# Altium PCB ZYNQ-HS-DEV-PCB.PcbDoc (part 10 of 10)
Units mm, origin at the board's own origin, x right, y up, seen from the top; angles counter-clockwise.
Board outline 125.25 x 111 mm, 10 copper layers (S1 (SIG), S2 (GND), S3 (SIG), S4 (GND), S5 (PWR), S6 (SIG), S7 (GND), S8 (SIG), S9 (GND), S10 (SIG)), stack 1.597 mm thick; 539 components, 408 nets, 2443 pads, 876 vias.
Unrouted connection lines stored in the file: 1310.
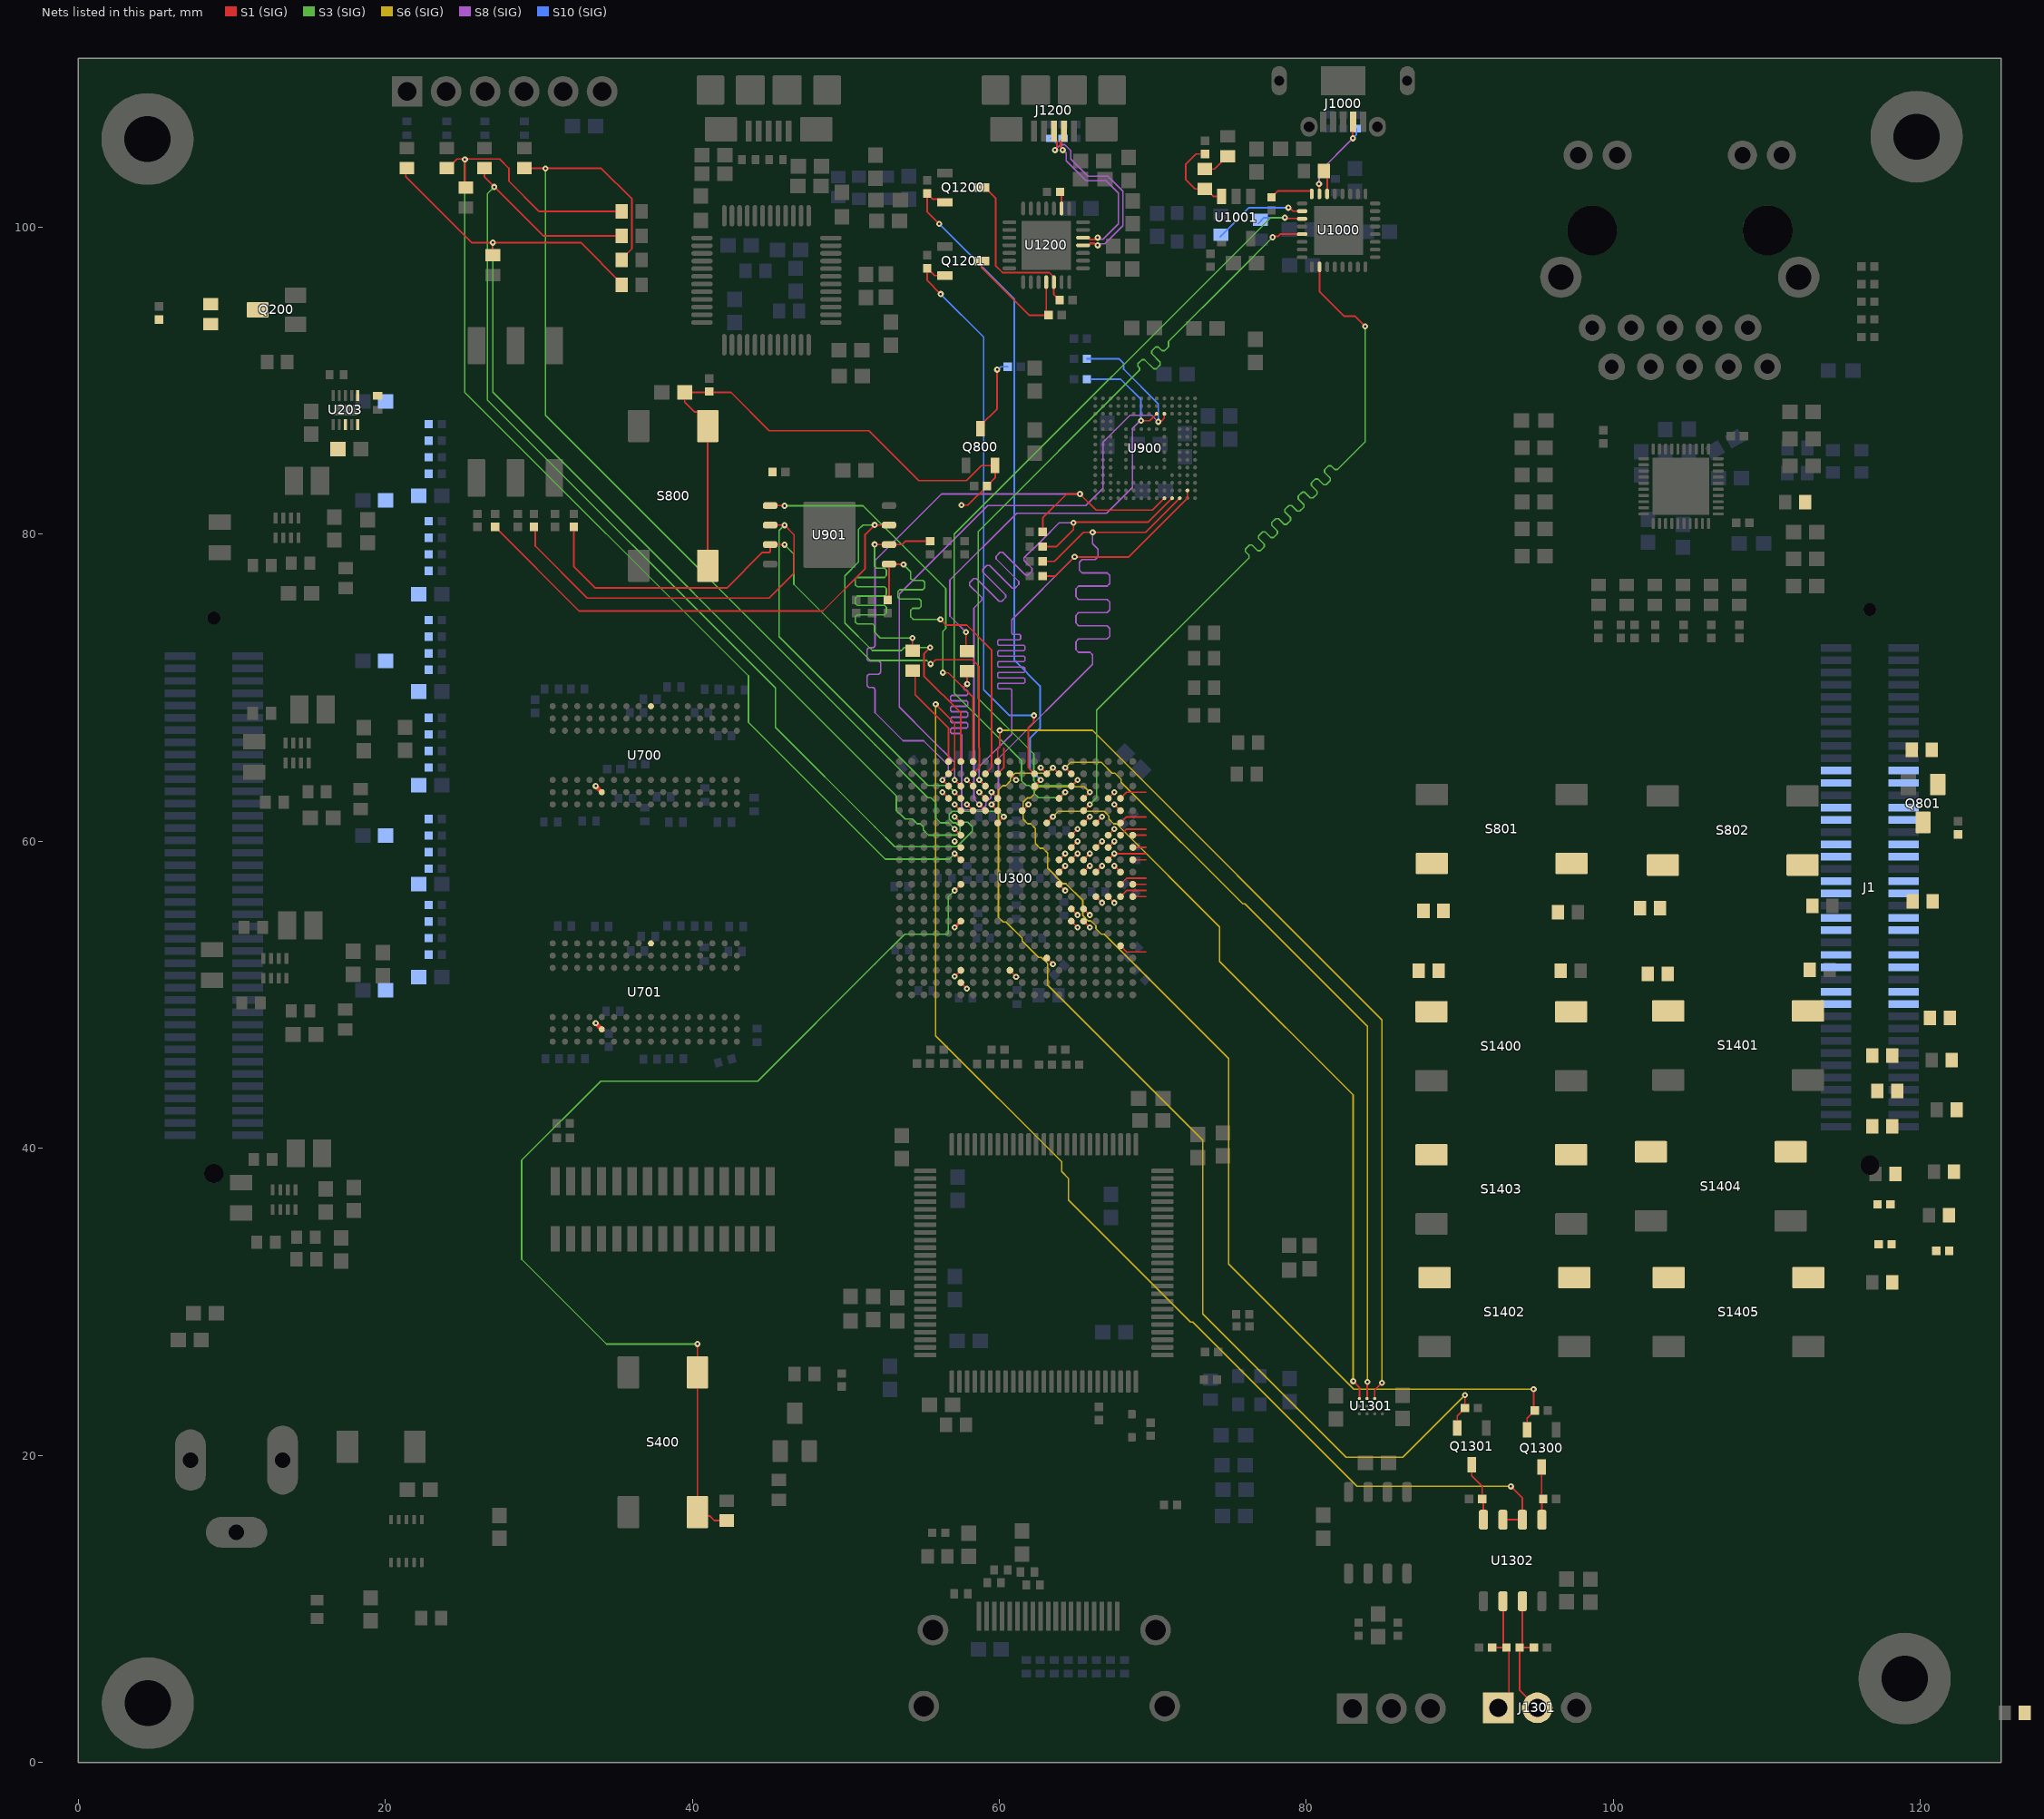
[diagram p14: the nets of this part, all layers, seen from the top]

## Via types
v1: diameter 0.4, hole 0.15, S1 (SIG) to S10 (SIG), tented both sides, 746 vias
v2: diameter 0.5, hole 0.25, S1 (SIG) to S10 (SIG), tented both sides, 108 vias
v3: diameter 0.5, hole 0.2, S1 (SIG) to S10 (SIG), tented both sides, 11 vias
v4: diameter 0.6, hole 0.3, S1 (SIG) to S10 (SIG), tented both sides, 10 vias
v5: diameter 0.45, hole 0.15, S1 (SIG) to S10 (SIG), tented both sides, 1 vias

## Nets (pads, with @x,y where several pads share a name; then routed paths per layer and width w, separated by ;. In a path a pad name is that pad's centre, name@x,y a point inside that pad or via, vN(x,y) a via of type N, cw(c..) or ccw(c..) an arc to the next point about the centre after c; other vN are vias at no path point) (continued)
OTG_ID: D1002.2 J1000.4 U1000.23 | length 6.4
  S1 (SIG) w0.11: v1(80.825,102.825) 80.838,102.812 80.838,102.187 U1000.23@80.85,102.175 ; v1(83.025,105.8) 83.025,106.85 J1000.4@83.05,106.875
  S8 (SIG) w0.1: v1(80.825,102.825) 80.825,103.6 v1(83.025,105.8)
  S10 (SIG) w0.11: v1(83.025,105.8) 83.25,106.025 D1002.2@83.25,106.425
OTG_NXT: U300.E16 U1000.2 | length 53
  S1 (SIG) w0.11: U300.E16@65.488,61.995 v1(65.888,62.395) ; U1000.2@80.85,97.4 80.85,95.825 82.475,94.2 83.175,94.2 v1(83.825,93.55)
  S3 (SIG) w0.1: v1(65.888,62.395) 66.338,62.845 66.338,68.538 76.225,78.425 76.26,78.46 76.26,78.632 76.025,78.868 76.025,79.04 76.283,79.298 76.455,79.298 76.822,78.93 76.994,78.93 77.252,79.188 77.252,79.36 76.885,79.728 76.885,79.9 77.143,80.158 77.315,80.158 77.682,79.79 77.854,79.79 78.112,80.048 78.112,80.22 77.745,80.587 77.745,80.759 78.003,81.017 78.175,81.017 78.542,80.65 78.714,80.65 78.972,80.908 78.972,81.08 78.604,81.447 78.604,81.619 78.862,81.877 79.034,81.877 79.402,81.51 79.574,81.51 79.832,81.768 79.832,81.94 79.464,82.307 79.464,82.479 79.722,82.737 79.894,82.737 80.262,82.369 80.434,82.369 80.692,82.627 80.692,82.799 80.324,83.167 80.324,83.339 80.582,83.597 80.754,83.597 81.122,83.229 81.294,83.229 81.552,83.487 81.552,83.659 81.184,84.027 81.184,84.199 81.442,84.457 81.614,84.457 81.849,84.221 82.021,84.221 82.874,85.074 83.825,86.025 v1(83.825,93.55)
OTG_OC_LED: D1003.1 R1004.1 | length 1.9
  S1 (SIG) w0.11: D1003.1@73.375,103.8 74.015,103.8 74.455,104.24 74.455,104.28 74.8,104.625 R1004.1@74.875,104.625
OTG_RBIAS: R1005.2 U1000.24 | length 2.9
  S1 (SIG) w0.11: R1005.2@77.725,101.95 78.132,102.357 80.285,102.357 80.35,102.292 U1000.24@80.35,102.175
OTG_RCLK: R1002.1 U1000.26 | length 6.2
  S1 (SIG) w0.11: v1(78.825,101.275) 78.891,101.275 79.116,101.05 79.7,101.05 U1000.26@79.713,101.037
  S10 (SIG) w0.11: R1002.1@74.376,99.375 76.276,101.275 v1(78.825,101.275)
OTG_RST: R1001.1 U300.D14 U1000.27 | length 55.1
  S1 (SIG) w0.11: U300.D14@63.888,62.795 v1(64.288,63.195) ; v1(78.6,100.625) 78.648,100.577 79.673,100.577 U1000.27@79.713,100.537
  S3 (SIG) w0.1: v1(64.288,63.195) 63.938,62.845 62.543,62.845 62.265,63.123 62.265,63.313 61.946,63.631 61.756,63.631 61.438,63.95 61.438,65.262 60,66.7 57.05,69.65 57.05,80 77.675,100.625 v1(78.6,100.625)
  S10 (SIG) w0.11: R1001.1@76.875,100.25 77.25,100.625 v1(78.6,100.625)
OTG_STP: U300.C15 U1000.29 | length 53.1
  S1 (SIG) w0.11: U300.C15@64.688,63.595 v1(65.088,63.995) ; v1(77.8,99.35) 77.856,99.405 78.151,99.405 78.295,99.55 U1000.29@79.7,99.55
  S3 (SIG) w0.1: v1(65.088,63.995) 64.738,63.645 62.543,63.645 62.238,63.95 62.238,65.687 58.625,69.3 58.625,80.175 69.088,90.637 69.123,90.673 69.123,90.845 69.024,90.944 69.024,91.116 69.282,91.373 69.454,91.373 70.048,90.779 70.22,90.779 70.478,91.037 70.478,91.209 69.922,91.766 69.922,91.938 70.18,92.196 70.352,92.196 70.585,91.963 70.757,91.963 71.015,92.221 71.015,92.393 71.015,92.564 75.338,96.887 v1(77.8,99.35)
OTG_SW_OCN: D1003.2 R1003.2 U1001.3 | length 5.3
  S1 (SIG) w0.11: R1003.2@73.4,104.775 72.8,104.775 72.15,104.125 72.15,103.1 72.75,102.5 D1003.2@73.375,102.5 73.45,102.5 73.95,102 U1001.3@74.475,102
OTG_VBUS: R1000.1 U1000.22 | length 1.6
  S1 (SIG) w0.11: R1000.1@81.125,103.675 81.35,103.45 U1000.22@81.35,102.175
PG_ALL_LA: D201.1 R210.1
PG_ALL_LK: D201.2 Q200.3
PL13_BTN_1: R1403.2 U300.V6 | length 0.6
  S1 (SIG) w0.11: v1(57.088,51.195) U300.V6@57.488,51.595
PL13_BTN_1_SW: R1403.1 R1405.1 S1400.1 S1400.2
PL13_BTN_2: R1404.2 U300.W6 | length 0.6
  S1 (SIG) w0.11: U300.W6@57.488,50.795 v1(57.888,50.395)
PL13_BTN_2_SW: R1404.1 R1406.1 S1401.1 S1401.2
PL13_LED: R1401.2 U300.V10 | length 0.6
  S1 (SIG) w0.11: U300.V10@60.688,51.595 60.688,51.58 61.088,51.18 v1(61.088,51.165)
PL13_LED_A: D1400.1 R1401.1
PL34_BTN_1: R1409.2 U300.P16 | length 0.6
  S1 (SIG) w0.11: U300.P16@65.488,54.795 v1(65.888,54.395)
PL34_BTN_1_SW: R1409.1 R1414.1 S1403.1 S1403.2
PL34_BTN_2: R1411.2 U300.T19 | length 1.8
  S1 (SIG) w0.11: U300.T19@67.888,53.195 68.288,52.795 69.548,52.795
PL34_BTN_2_SW: R1411.1 R1415.1 S1405.1 S1405.2
PL34_LED: R1407.2 U300.P15 | length 0.6
  S1 (SIG) w0.11: U300.P15@64.688,54.795 v1(65.088,54.395)
PL34_LED_A: D1402.1 R1407.1
PL34_PUDCB: R1400.2 U300.U13 | length 0.6
  S1 (SIG) w0.11: U300.U13@63.088,52.395 v1(63.488,51.995)
PL35_BTN_1: R1408.2 U300.J16 | length 0.6
  S1 (SIG) w0.11: U300.J16@65.488,58.795 v1(65.888,59.195)
PL35_BTN_1_SW: R1408.1 R1412.1 S1402.1 S1402.2
PL35_BTN_2: R1410.2 U300.J15 | length 0.6
  S1 (SIG) w0.11: U300.J15@64.688,58.795 v1(65.088,59.195)
PL35_BTN_2_SW: R1410.1 R1413.1 S1404.1 S1404.2
PL35_LED: R1402.2 U300.K16 | length 0.6
  S1 (SIG) w0.11: U300.K16@65.488,57.995 v1(65.888,58.395)
PL35_LED_A: D1401.1 R1402.1
PL_CLK_125: R1121.2 U300.K17 | length 0.6
  S1 (SIG) w0.11: U300.K17@66.288,57.995 v1(66.688,58.395)
PROGRAM_B_0: R403.1 S400.3 S400.4 U300.L6 | length 70.7
  S1 (SIG) w0.11: v1(40.325,27.25) S400.3@40.325,25.4 S400.4@40.325,16.3 40.569,16.056 41.126,16.056 41.432,15.75 R403.1@42.225,15.75 ; v1(57.088,56.795) U300.L6@57.488,57.195
  S3 (SIG) w0.1: v1(40.325,27.25) 34.4,27.25 28.875,32.775 28.875,39.225 34.025,44.375 44.26,44.375 51.9,52.015 53.83,53.945 56.616,53.945 56.675,54.003 56.675,56.382 v1(57.088,56.795)
PS_1V8MODE: R808.2 U300.D5 | length 0.6
  S1 (SIG) w0.11: v1(56.288,63.195) U300.D5@56.688,62.795
PS_3V3MODE: R807.2 U300.D8 | length 0.6
  S1 (SIG) w0.11: v1(58.688,63.195) U300.D8@59.088,62.795
PS_BTN_1: R821.2 U300.B13 | length 0.6
  S1 (SIG) w0.11: v1(62.688,64.795) U300.B13@63.088,64.395
PS_BTN_2: R822.2 U300.B9 | length 1.8
  S1 (SIG) w0.11: U300.B9@59.888,64.395 60.288,64.795 60.288,66.055
PS_CLK: R817.2 U300.E7 | length 0.6
  S1 (SIG) w0.11: v1(57.888,62.395) U300.E7@58.288,61.995
PS_COUT: R817.1 X800.3
PS_LED: R820.2 U300.E6 | length 0.6
  S1 (SIG) w0.11: v1(57.088,62.395) U300.E6@57.488,61.995
PS_LED_A: D800.1 R819.1
PS_LED_G: Q801.1 R820.1
PS_LED_K: D800.2 Q801.3
PS_MIO_VREF: C803.1 R803.1 R804.1 U300.E11 | length 0.6
  S1 (SIG) w0.11: U300.E11@61.488,61.995 v1(61.888,62.395)
PS_POR: R802.2 U300.C7 U800.4 | length 0.6
  S1 (SIG) w0.11: v1(57.888,63.995) U300.C7@58.288,63.595
PS_QSPI_IO0_M3: R912.2 U300.B8 U901.5 | length 25.6
  S1 (SIG) w0.11: R912.2@52.744,75.73 52.807,75.793 U901.5@52.807,78.058 52.818,78.047 53.743,78.047 v1(53.754,78.036) ; v1(56.16,74.45) 56.527,74.083 57.869,74.083 59.488,72.464 59.488,64.795 U300.B8@59.088,64.395
  S3 (SIG) w0.1: v1(53.754,78.036) 54.226,77.564 54.226,77.17 54.226,77.12 54.348,76.999 55.016,76.999 55.137,76.877 55.137,76.512 55.016,76.391 53.513,76.391 53.392,76.269 53.392,75.904 53.513,75.783 54.781,75.783 54.903,75.661 54.903,75.296 54.781,75.175 54.348,75.175 54.226,75.053 54.226,74.621 54.348,74.499 54.397,74.45 v1(56.16,74.45)
PS_QSPI_IO1_M1: R914.2 U300.D6 U901.2 | length 48.1
  S1 (SIG) w0.11: R914.2@29.537,80.341 29.693,80.341 29.775,80.259 29.775,79.225 33.159,75.841 44.991,75.841 46.625,77.475 46.625,79.965 v1(46.003,80.587) ; U901.2@45.067,80.598 v1@45.992,80.598 ; v1(57.088,63.195) U300.D6@57.488,62.795
  S3 (SIG) w0.11: v1(46.003,80.587) 45.648,80.232 45.648,73.332 55.341,63.64 56.643,63.64 v1(57.088,63.195)
PS_QSPI_IO2_M2: R915.2 U300.B7 U901.3 | length 42.8
  S1 (SIG) w0.11: R915.2@32.282,80.479 32.282,77.893 33.675,76.5 42.25,76.5 44.567,78.817 45.003,78.817 45.067,78.881 U901.3@45.067,79.328 v1@45.992,79.328 ; v1(55.521,71.544) 55.563,71.544 55.839,71.82 58.249,71.82 58.675,71.394 58.675,66.1 58.688,66.087 58.688,64.795 U300.B7@58.288,64.395
  S3 (SIG) w0.1: v1(46.003,79.317) 46.609,78.711 46.609,76.745 51.579,71.775 55.262,71.775 55.493,71.544 v1(55.521,71.544)
PS_QSPI_IO3_M0: R911.2 U300.A6 U901.7 | length 54.2
  S1 (SIG) w0.11: R911.2@27.15,80.479 32.629,75 48.5,75 51.25,77.75 51.25,79.988 v1(51.871,80.609) ; v1@51.882,80.598 51.888,80.603 52.802,80.603 U901.7@52.807,80.598 ; v1(55.483,72.617) 55.08,72.214 55.08,70.763 57.488,68.355 U300.A6@57.488,65.195
  S3 (SIG) w0.1: v1(51.871,80.609) 51.109,80.609 50.819,80.319 50.819,78.194 49.925,77.3 49.925,74.225 51.721,72.429 53.619,72.429 53.807,72.617 v1(55.483,72.617)
PS_QSPI_SCK_M4: R806.1 R913.2 U901.6 | length 24.1
  S1 (SIG) w0.11: v1@51.882,79.328 53.072,79.328 53.657,79.328 53.876,79.547 R913.2@55.495,79.547 ; v1(54.334,73.246) 54.334,72.421 R806.1@54.397,72.358
  S3 (SIG) w0.1: v1(51.871,79.339) 51.871,78.33 51.871,77.919 51.993,77.798 52.519,77.798 52.641,77.676 52.641,77.311 52.519,77.19 50.741,77.19 50.619,77.068 50.619,76.703 50.741,76.582 52.519,76.582 52.641,76.46 52.641,76.095 52.519,75.974 50.741,75.974 50.619,75.852 50.619,75.487 50.741,75.366 52.519,75.366 52.641,75.244 52.641,74.879 52.519,74.758 50.741,74.758 50.619,74.636 50.619,74.271 50.741,74.15 51.749,74.15 51.871,74.028 51.871,73.978 51.871,73.619 52.244,73.246 v1(54.334,73.246)
PS_QSPI_SS: R908.1 U300.A7 U901.1 | length 26
  S1 (SIG) w0.11: U901.1@45.067,81.868 v1@45.992,81.868 ; v1(56.32,70.983) 56.34,70.963 56.685,70.963 58.288,69.36 U300.A7@58.288,65.195
  S3 (SIG) w0.1: v1(46.003,81.857) 51.118,81.857 56.51,76.465 56.51,73.86 56.32,73.67 v1(56.32,70.983)
PS_SD_CLK: R809.1 R900.1 U900.M6 | length 30.5
  S1 (SIG) w0.11: v1(57.825,73.625) 57.825,72.45 R809.1@57.9,72.375 ; v1(69.225,87.4) 69.796,87.4 U900.M6@70.246,87.85
  S8 (SIG) w0.1: v1(57.825,73.625) 56.775,74.675 56.775,77.025 61.125,81.375 66.991,81.375 68.675,83.059 68.675,86.899 69.176,87.4 v1(69.225,87.4)
  S10 (SIG) w0.11: 65.975,90.1 67.9,90.1 69.225,88.775 v1(69.225,87.4)
PS_SD_CMD: R901.1 U300.C6 U900.M5 | length 45.8
  S1 (SIG) w0.11: v1(57.088,63.995) U300.C6@57.488,63.595 ; v1(70.35,87.325) 70.405,87.38 70.555,87.38 70.735,87.56 70.735,87.839 U900.M5@70.746,87.85
  S8 (SIG) w0.1: v1(57.088,63.995) 57.088,65.137 55.525,66.7 53.475,68.75 53.475,76.1 59.25,81.875 65.625,81.875 66.748,82.998 66.748,85.997 68.501,87.75 69.925,87.75 v1(70.35,87.325)
  S10 (SIG) w0.11: R901.1@65.7,91.425 67.8,91.425 68.1,91.125 68.1,90.75 70.35,88.5 v1(70.35,87.325)
PS_SD_IO0: R905.1 U300.E9 U900.A3 | length 45.5
  S1 (SIG) w0.11: v1(59.488,62.395) U300.E9@59.888,61.995 ; R905.1@62.825,78.233 63.575,78.233 65.467,80.125 v1(66.075,80.125) 69.521,80.125 U900.A3@71.746,82.35
  S8 (SIG) w0.1: v1(59.488,62.395) 59.938,62.845 59.938,65.393 66.075,71.53 66.075,72.092 66.075,72.142 65.903,72.314 65.159,72.314 64.987,72.487 64.987,73.004 65.159,73.176 67.023,73.176 67.195,73.349 67.195,73.866 67.023,74.038 65.159,74.038 64.987,74.211 64.987,74.728 65.159,74.9 67.023,74.9 67.195,75.073 67.195,75.59 67.023,75.762 65.159,75.762 64.987,75.935 64.987,76.452 65.159,76.624 67.023,76.624 67.195,76.797 67.195,77.314 67.023,77.486 65.391,77.486 65.218,77.659 65.218,78.176 65.391,78.348 66.248,78.348 66.421,78.521 66.421,79.038 66.248,79.21 66.075,79.383 66.075,79.78 v1(66.075,80.125)
PS_SD_IO1: R904.1 U300.E8 U900.A4 | length 45.3
  S1 (SIG) w0.11: v1(58.688,62.395) U300.E8@59.088,61.995 ; R904.1@62.825,79.192 62.827,79.189 63.715,79.189 64.825,80.299 v1(64.825,80.75) 64.875,80.8 69.696,80.8 U900.A4@71.246,82.35
  S8 (SIG) w0.1: v1(58.688,62.395) 58.338,62.745 58.338,75.188 58.826,75.676 58.861,75.711 58.861,75.883 58.066,76.678 58.066,76.85 58.324,77.108 58.496,77.108 59.978,75.627 60.15,75.627 60.408,75.885 60.408,76.057 58.926,77.538 58.926,77.71 59.184,77.968 59.356,77.968 60.837,76.487 61.009,76.487 61.267,76.745 61.267,76.917 59.786,78.398 59.786,78.57 60.044,78.828 60.216,78.828 61.697,77.347 61.869,77.347 62.127,77.605 62.127,77.777 61.613,78.291 61.613,78.463 62.838,79.687 63.9,80.75 v1(64.825,80.75)
PS_SD_IO2: R903.1 U300.C5 U900.A5 | length 45.4
  S1 (SIG) w0.11: v1(56.288,63.995) U300.C5@56.688,63.595 ; R903.1@62.825,80.15 62.825,81.075 64.375,82.625 v1(65.25,82.625) 66.3,81.575 69.971,81.575 U900.A5@70.746,82.35
  S8 (SIG) w0.1: v1(56.288,63.995) 56.663,64.37 56.663,64.639 56.663,64.95 55.063,66.55 53.732,66.55 51.9,68.382 51.9,69.798 51.9,69.848 ccw(c51.728,69.848) 51.728,70.02 51.553,70.02 cw(c51.553,70.192) 51.381,70.192 51.381,70.71 cw(c51.553,70.71) 51.553,70.882 52.091,70.882 ccw(c52.091,71.054) 52.263,71.054 52.263,71.572 ccw(c52.091,71.572) 52.091,71.744 51.553,71.744 cw(c51.553,71.916) 51.381,71.916 51.381,72.434 cw(c51.553,72.434) 51.553,72.606 51.728,72.606 ccw(c51.728,72.778) 51.9,72.778 51.9,76.988 51.9,78.3 56.225,82.625 v1(65.25,82.625)
PS_SD_IO3: R902.1 U300.C8 U900.B2 | length 45.7
  S1 (SIG) w0.11: v1(58.688,63.995) U300.C8@59.088,63.595 ; 63.1,77.275 63.65,77.275 v1(64.9,78.525) 68.421,78.525 72.246,82.35 U900.B2@72.246,82.85
  S8 (SIG) w0.1: v1(58.688,63.995) 58.688,64.865 60.8,66.978 60.8,69.817 60.8,69.867 60.729,69.938 59.96,69.938 59.889,70.008 59.889,70.221 59.96,70.292 61.589,70.292 61.66,70.362 61.66,70.575 61.589,70.646 59.96,70.646 59.889,70.716 59.889,70.929 59.96,71 61.589,71 61.66,71.07 61.66,71.283 61.589,71.354 59.96,71.354 59.889,71.424 59.889,71.637 59.96,71.708 61.589,71.708 61.66,71.778 61.66,71.991 61.589,72.062 59.96,72.062 59.889,72.132 59.889,72.345 59.96,72.416 61.589,72.416 61.66,72.486 61.66,72.699 61.589,72.77 59.96,72.77 59.889,72.84 59.889,73.053 59.96,73.124 61.308,73.124 61.379,73.194 61.379,73.407 61.308,73.478 60.871,73.478 60.8,73.548 60.8,74.101 60.8,74.425 v1(64.9,78.525)
PS_SRST: C801.2 Q800.2 R800.1 R818.1 S800.3 S800.4 U300.B10 | length 39.4
  S1 (SIG) w0.11: S800.4@41,77.95 S800.3@41,87.05 41,87.331 40.356,87.975 40.135,87.975 39.5,88.61 C801.2@39.5,89.25 41.046,89.25 R800.1@41.1,89.304 41.154,89.25 42.5,89.25 45,86.75 51.5,86.75 54.75,83.5 57.849,83.5 58.824,84.475 Q800.2@59.725,84.475 59.725,83.675 R818.1@59.2,83.15 57.95,81.9 v1(57.525,81.9) ; U300.B10@60.688,64.395 v1(61.088,63.995)
PSBTN1SW: R821.1 R823.1 S801.1 S801.2
PSBTN2SW: R822.1 R824.1 S802.1 S802.2
QSPI_CLK: R806.2 U300.A5 | length 6.8
  S1 (SIG) w0.11: R806.2@54.397,71.058 54.511,70.944 54.511,69.55 56.688,67.374 U300.A5@56.688,65.195
RS485_A: J1301.1 R1304.1 R1305.2 U1302.6 | length 8.3
  S1 (SIG) w0.11: R1304.1@92.1,7.475 R1305.2@93.037,7.475 ; J1301.1@92.5,3.55 93.197,4.247 93.197,7.315 R1305.2@93.037,7.475 ; U1302.6@92.805,10.5 92.818,10.487 92.818,7.695 R1305.2@93.037,7.475
RS485_B: J1301.2 R1305.1 R1308.2 U1302.7 | length 8.4
  S1 (SIG) w0.11: U1302.7@94.075,10.5 94.075,7.662 R1305.1@93.888,7.475 ; R1308.2@94.825,7.475 R1305.1@93.888,7.475 ; J1301.2@95.04,3.55 93.888,4.703 R1305.1@93.888,7.475
RS485_IC_RX: Q1300.3 R1303.2 U1302.1 | length 3.5
  S1 (SIG) w0.11: Q1300.3@95.325,19.25 95.325,17.25 R1303.2@95.425,17.15 95.345,17.07 U1302.1@95.345,15.8
RS485_IC_TX: Q1301.3 R1307.2 U1302.4 | length 3.9
  S1 (SIG) w0.11: Q1301.3@90.775,19.375 90.775,18.663 91.45,17.988 R1307.2@91.45,17.15 91.535,17.065 U1302.4@91.535,15.8
RSCAN.CAN_RX: U300.B15 U1301.B3 | length 51.9
  S1 (SIG) w0.11: v1(64.288,64.795) U300.B15@64.688,64.395 ; U1301.B3@83.95,23.7 83.962,23.713 83.962,24.762 v1(83.975,24.775)
  S6 (SIG) w0.1: v1(64.288,64.795) 64.638,65.145 66.643,65.145 67.343,64.445 67.533,64.445 67.938,64.04 67.938,63.85 75.861,55.926 75.994,55.926 83.975,47.945 83.975,24.8 v1@84,24.775
RSCAN.CAN_STB: U300.A9 U1301.C3 | length 59.7
  S1 (SIG) w0.11: U300.A9@59.888,65.195 59.888,65.989 60.025,66.126 v1(60.025,67.225) ; U1301.C3@84.45,23.7 84.45,24.25 v1(84.925,24.725)
  S6 (SIG) w0.1: v1(60.025,67.225) 66.07,67.225 84.925,48.37 v1(84.925,24.725) v1@84.95,24.7
RSCAN.CAN_TX: U300.F13 U1301.A3 | length 49.3
  S1 (SIG) w0.11: U300.F13@63.088,61.195 v1(63.488,61.595) ; v1(83.05,24.825) 83.45,24.425 U1301.A3@83.45,23.7
  S6 (SIG) w0.1: v1(63.488,61.595) 63.838,61.945 66.833,61.945 67.138,61.64 67.138,61.45 67.443,61.145 67.633,61.145 74.35,54.427 74.35,52.17 83.05,43.47 v1(83.05,24.825)
RSCAN.RS485_DE: U300.B5 U1302.2 U1302.3 | length 81.4
  S1 (SIG) w0.11: v1(55.85,68.925) 57.088,67.687 57.088,64.795 U300.B5@56.688,64.395 ; U1302.3@92.805,15.8 U1302.2@94.075,15.8 94.075,17.225 v1(93.325,17.975)
  S6 (SIG) w0.1: v1(55.85,68.925) 55.85,47.33 64.05,39.13 64.05,38.484 64.5,38.034 64.5,36.634 72.459,28.675 72.591,28.675 83.291,17.975 v1(93.325,17.975)
RSCAN.RS485_RX: Q1300.2 R1302.2 U300.D16 | length 67.9
  S1 (SIG) w0.11: U300.D16@65.488,62.795 v1(65.888,63.195) ; Q1300.2@94.375,21.65 94.375,22.425 R1302.2@94.875,22.925 94.8,23 v1(94.8,24.3)
  S6 (SIG) w0.1: v1(65.888,63.195) 65.538,63.545 62.543,63.545 62.275,63.277 62.275,63.087 62.008,62.82 61.818,62.82 61.538,62.54 61.538,61.45 61.843,61.145 62.033,61.145 62.338,60.84 62.338,59.85 62.643,59.545 62.833,59.545 63.138,59.24 63.138,58.25 64.152,57.235 64.342,57.235 65.438,56.14 65.438,55.15 65.768,54.82 65.958,54.82 66.288,54.49 66.288,54.3 66.643,53.945 66.833,53.945 74.928,45.85 74.928,32.452 83.08,24.3 v1(94.8,24.3)
RSCAN.RS485_TX: Q1301.2 R1306.2 U300.B14 | length 69.7
  S1 (SIG) w0.11: v1(63.488,64.795) U300.B14@63.888,64.395 ; Q1301.2@89.825,21.775 89.825,22.575 R1306.2@90.325,23.075 v1(90.325,23.925)
  S6 (SIG) w0.1: v1(63.488,64.795) 63.121,64.428 61.026,64.428 60.717,64.119 60.717,63.929 60.415,63.627 60.225,63.627 59.938,63.34 59.938,55.05 60.243,54.745 60.433,54.745 61.488,53.69 61.488,53.5 62.543,52.445 62.733,52.445 63.138,52.04 63.138,50.642 73.25,40.53 73.25,29.205 82.58,19.875 86.275,19.875 v1(90.325,23.925)
SD_CLK_OUT: R809.2 U300.D9 | length 20.3
  S1 (SIG) w0.11: v1(57.9,70.25) R809.2@57.9,71.075 ; v1(59.488,63.195) U300.D9@59.888,62.795
  S8 (SIG) w0.1: v1(57.9,70.25) 57.753,70.103 57.679,70.029 57.679,69.929 57.75,69.858 57.865,69.858 57.936,69.787 57.936,69.575 57.865,69.504 56.89,69.504 56.82,69.433 56.82,69.221 56.89,69.15 57.865,69.15 57.936,69.079 57.936,68.867 57.865,68.796 56.89,68.796 56.82,68.725 56.82,68.513 56.89,68.442 57.865,68.442 57.936,68.371 57.936,68.159 57.865,68.088 56.89,68.088 56.82,68.017 56.82,67.805 56.89,67.734 57.865,67.734 57.936,67.663 57.936,67.451 57.865,67.38 56.89,67.38 56.82,67.309 56.82,67.097 56.89,67.026 57.467,67.026 57.538,66.955 57.538,66.905 57.538,62.25 57.743,62.045 58.833,62.045 59.131,62.344 59.131,62.534 59.443,62.845 59.443,63.15 v1(59.488,63.195)
SD_RST: Q800.3 R907.1 | length 5.1
  S1 (SIG) w0.11: Q800.3@58.775,86.875 58.775,87.095 59.85,88.17 v1(59.85,90.725)
  S10 (SIG) w0.11: v1(59.85,90.725) 59.919,90.725 60.11,90.916 R907.1@60.55,90.916
SE35.L3_35_N: J1.23 U300.D19 | length 1.8
  S1 (SIG) w0.11: U300.D19@67.888,62.795 68.288,63.195 69.548,63.195
SE35.L3_35_P: J1.21 U300.D18 | length 0.6
  S1 (SIG) w0.11: U300.D18@67.088,62.795 v1(67.488,63.195)
SE35.L5_35_N: J1.29 U300.F16 | length 0.6
  S1 (SIG) w0.11: U300.F16@65.488,61.195 v1(65.888,61.595)
SE35.L5_35_P: J1.27 U300.E19 | length 0.6
  S1 (SIG) w0.11: v1(67.488,62.395) U300.E19@67.888,61.995
SE35.L6_35_N: J1.35 U300.M19 | length 1.8
  S1 (SIG) w0.11: U300.M19@67.888,56.395 68.288,56.795 69.548,56.795
SE35.L6_35_P: J1.33 U300.F17 | length 0.6
  S1 (SIG) w0.11: U300.F17@66.288,61.195 v1(66.688,61.595)
SE35.L7_35_N: J1.41 U300.M17 | length 0.6
  S1 (SIG) w0.11: U300.M17@66.288,56.395 v1(66.688,55.995)
SE35.L7_35_P: J1.39 U300.M20 | length 0.9
  S1 (SIG) w0.11: U300.M20@68.688,56.395 69.548,56.395
SE35.L8_35_N: J1.47 U300.L19 | length 1.8
  S1 (SIG) w0.11: U300.L19@67.888,57.195 68.288,57.595 69.548,57.595
SE35.L8_35_P: J1.45 U300.M18 | length 0.6
  S1 (SIG) w0.11: U300.M18@67.088,56.395 v1(67.488,55.995)
SE35.L9_35_N: J1.53 U300.K19 | length 0.6
  S1 (SIG) w0.11: v1(67.488,58.395) U300.K19@67.888,57.995
SE35.L9_35_P: J1.51 U300.L20 | length 0.9
  S1 (SIG) w0.11: U300.L20@68.688,57.195 69.548,57.195
SE35.L13_35_N: J1.59 U300.J18 | length 2.6
  S1 (SIG) w0.11: U300.J18@67.088,58.795 v1(67.488,59.195) 69.548,59.195
SE35.L13_35_P: J1.57 U300.H17 | length 0.6
  S1 (SIG) w0.11: U300.H17@66.288,59.595 v1(66.688,59.995)
SE35.L14_35_N: J1.24 U300.F19 | length 1.8
  S1 (SIG) w0.11: U300.F19@67.888,61.195 68.288,61.595 69.548,61.595
SE35.L14_35_P: J1.22 U300.H18 | length 0.6
  S1 (SIG) w0.11: U300.H18@67.088,59.595 v1(67.488,59.995)
SE35.L16_35_N: J1.30 U300.J20 | length 0.9
  S1 (SIG) w0.11: U300.J20@68.688,58.795 69.548,58.795
SE35.L16_35_P: J1.28 U300.G18 | length 0.6
  S1 (SIG) w0.11: U300.G18@67.088,60.395 v1(67.488,60.795)
SE35.L17_35_N: J1.36 U300.G19 | length 1.8
  S1 (SIG) w0.11: U300.G19@67.888,60.395 68.288,60.795 69.548,60.795
SE35.L17_35_P: J1.34 U300.H20 | length 0.9
  S1 (SIG) w0.11: U300.H20@68.688,59.595 69.548,59.595
SE35.L18_35_N: J1.42 U300.H15 | length 0.6
  S1 (SIG) w0.11: U300.H15@64.688,59.595 v1(65.088,59.995)
SE35.L18_35_P: J1.40 U300.G20 | length 0.9
  S1 (SIG) w0.11: U300.G20@68.688,60.395 69.548,60.395
SE35.L19_35_N: J1.48 U300.K14 | length 0.6
  S1 (SIG) w0.11: U300.K14@63.888,57.995 v1(64.288,58.395)
SE35.L19_35_P: J1.46 U300.G15 | length 0.6
  S1 (SIG) w0.11: U300.G15@64.688,60.395 v1(65.088,60.795)
SE35.L20_35_N: J1.54 U300.N15 | length 0.6
  S1 (SIG) w0.11: U300.N15@64.688,55.595 v1(65.088,55.195)
SE35.L20_35_P: J1.52 U300.J14 | length 0.6
  S1 (SIG) w0.11: U300.J14@63.888,58.795 v1(64.288,59.195)
SE35.L21_35_N: J1.60 U300.L14 | length 0.6
  S1 (SIG) w0.11: U300.L14@63.888,57.195 v1(64.288,56.795)
SE35.L21_35_P: J1.58 U300.N16 | length 0.6
  S1 (SIG) w0.11: U300.N16@65.488,55.595 v1(65.888,55.195)
TCK_0: R400.1 R500.2 R505.1 U300.J6 | length 77.6
  S1 (SIG) w0.11: R505.1@24,103.85 24.075,103.85 24.675,104.45 27.436,104.45 28.05,103.836 28.05,103 30.017,101.033 R500.2@35.4,101.033 ; v1(25.178,104.423) 25.178,102.646 R400.1@25.236,102.588 ; v1(57.088,59.195) U300.J6@57.488,58.795
  S3 (SIG) w0.1: v1(25.178,104.423) 25.178,89.244 43.65,70.772 43.65,67.755 52.566,58.839 56.731,58.839 v1(57.088,59.195)
TDI_0: R502.2 R507.1 U300.G6 | length 67.1
  S1 (SIG) w0.11: R507.1@29.05,103.85 34.047,103.85 36.061,101.835 36.061,98.611 35.4,97.95 R502.2@35.4,97.875 ; v1(57.088,60.795) U300.G6@57.488,60.395
  S3 (SIG) w0.1: v1(30.43,103.829) 30.43,87.757 51.9,66.287 55.343,62.845 55.533,62.845 55.86,62.518 55.86,61.528 56.186,61.201 56.681,61.201 v1(57.088,60.795)
TDO_0: R501.2 R506.1 U300.F6 | length 73
  S1 (SIG) w0.11: R506.1@26.45,103.85 26.45,103.285 30.293,99.442 R501.2@35.4,99.442 ; v1(57.088,61.595) U300.F6@57.488,61.195
  S3 (SIG) w0.1: v1(27.085,102.624) 26.65,102.189 26.65,88.745 45.405,69.99 45.405,67.425 51.9,60.93 53.185,59.645 57.233,59.645 58.238,60.65 58.238,60.94 57.939,61.239 57.444,61.239 v1(57.088,61.595)
TMS_0: R401.1 R503.2 R509.1 U300.F9 | length 77.2
  S1 (SIG) w0.11: R509.1@21.4,103.85 21.325,103.775 21.325,103.285 25.61,99 v1(27,99) ; R401.1@27,98.176 v1(27,99) ; R503.2@35.4,96.258 35.4,96.333 32.733,99 v1(27,99) ; U300.F9@59.888,61.195 v1(60.288,61.595)
  S3 (SIG) w0.1: v1(27,99) 27,89.25 53.29,62.96 53.29,62.015 53.856,61.45 54.338,61.45 54.543,61.245 54.643,61.145 54.833,61.145 55.038,60.94 55.038,60.75 55.388,60.4 57.188,60.4 57.438,60.65 57.438,60.94 57.183,61.195 56.993,61.195 56.738,61.45 56.738,61.74 56.943,61.945 59.938,61.945 v1(60.288,61.595)
UART_IC_RX: Q1201.3 R1203.2 U1200.25 | length 8.3
  S1 (SIG) w0.11: Q1201.3@58.85,97.8 58.85,97.355 61.93,94.275 R1203.2@63.2,94.275 63.05,94.425 U1200.25@63.05,96.425
UART_IC_TX: Q1200.3 R1200.2 U1200.26 | length 11.3
  S1 (SIG) w0.11: Q1200.3@58.85,102.575 59.07,102.575 59.752,101.893 59.752,97.502 60.209,97.045 63.255,97.045 63.55,96.75 63.55,95.625 R1200.2@63.925,95.25
USB_UART_D_N: D1201.2 J1200.2 U1200.5 | length 12.2
  S1 (SIG) w0.121: v1(64.125,105.025) 64.125,105.1 63.999,105.226 63.999,105.587 64.2,105.787 J1200.2@64.2,106.262 ; U1200.5@65.45,99.325 65.784,99.325 65.91,99.199 66.199,99.199 66.325,99.325 v1(66.4,99.325)
  S8 (SIG) w0.1: v1(64.125,105.025) 64.163,105.025 64.35,104.838 64.35,104.325 65.651,103.025 66.95,103.025 67.75,102.225 67.75,100.225 66.75,99.225 66.581,99.225 66.481,99.325 v1(66.4,99.325)
  S10 (SIG) w0.121: v1(64.125,105.025) 64.125,105.1 63.999,105.226 63.999,105.645 D1201.2@64.147,105.793
USB_UART_D_P: D1202.2 J1200.3 U1200.4 | length 14
  S1 (SIG) w0.121: J1200.3@63.55,106.262 63.55,105.787 63.751,105.587 63.751,105.226 63.625,105.1 v1(63.625,105.025) ; U1200.4@65.45,98.825 65.784,98.825 65.91,98.951 66.199,98.951 66.325,98.825 v1(66.4,98.825)
  S8 (SIG) w0.1: v1(63.625,105.025) 63.975,105.375 64.27,105.375 64.65,104.995 64.65,104.45 65.775,103.325 67.075,103.325 68.05,102.349 68.05,100.101 66.874,98.925 66.581,98.925 66.481,98.825 v1(66.4,98.825)
  S10 (SIG) w0.121: D1202.2@63.329,105.793 63.379,105.793 63.751,105.421 63.751,105.226 63.625,105.1 v1(63.625,105.025)
USB_UART_RST: R1202.1 U1200.9 | length 1.1
  S1 (SIG) w0.11: R1202.1@63.95,102.3 64.05,102.2 U1200.9@64.05,101.225
USB_UART_RX: Q1200.2 R1201.2 U300.C12 | length 43.8
  S1 (SIG) w0.11: v1(56.075,100.225) 55.3,101 R1201.2@55.3,102.2 55.676,101.824 56.251,101.824 Q1200.2@56.45,101.625 ; U300.C12@62.288,63.595 v1(62.688,63.995)
  S10 (SIG) w0.11: v1(56.075,100.225) 60.975,95.325 60.975,71.8 62.652,70.123 62.652,67.357 61.995,66.7 61.995,64.687 v1(62.688,63.995)
USB_UART_TX: Q1201.2 R1204.2 U300.B12 | length 38.4
  S1 (SIG) w0.11: v1(56.175,95.65) 55.3,96.525 R1204.2@55.3,97.325 55.775,96.85 Q1201.2@56.45,96.85 ; v1(62.25,68.2) 62.25,67.775 61.888,67.413 61.888,64.795 U300.B12@62.288,64.395
  S10 (SIG) w0.11: v1(56.175,95.65) 58.975,92.85 58.975,69.875 60.65,68.2 v1(62.25,68.2)
VTT: C212.2 C602.2 C603.2 C604.2 C605.2 C606.2 C607.2 C608.2 C609.2 C610.2 C611.2 C612.2 R600.1 R601.1 R602.1 R603.1 R604.1 R605.1 R606.1 R607.1 R608.1 R609.1 R610.1 R611.1 R612.1 R613.1 R614.1 R615.1 R616.1 R617.1 R618.1 R619.1 R620.1 R621.1 R622.1 R623.1 U203.3 U203.5
VTT_REF: C213.2 C600.2 C601.2 C712.2 C713.2 U203.6 U300.H6 U300.P6 U700.H1 U700.M8 U701.H1 U701.M8 | length 1.7
  S1 (SIG) w0.2: v1(57.088,54.395) U300.P6@57.488,54.795
  S1 (SIG) w0.3: v1(33.7,48.15) U701.M8@34.1,47.75 ; v1(33.7,63.6) U700.M8@34.1,63.2
  other v1: 57.088,59.995
pads on no net: J1.63 J1.64 J1.65 J1.66 J1.69 J1.70 J1.71 J1.72 J1.75 J1.76 J1.77 J1.78 J1.MH J2.15 J2.17 J2.75 J2.77 J2.MH J500.4 J1100.1 J1100.MH J1200.4 U201.9 U300.A20 U300.B19 U300.B20 U300.C20 U300.D20 U300.E17 U300.E18 U300.F20 U300.G14 U300.G17 U300.H16 U300.J19 U300.K18 U300.L15 U300.L16 U300.L17 U300.M14 U300.M15 U300.R19 U300.T9 U300.U10 U300.U14 U300.V5 U300.V7 U300.V11 U300.V13 U300.Y12 U500.2 U500.17 U500.18 U500.19 U500.20 U500.21 U500.25 U500.26 U500.27 U500.28 U500.29 U500.30 U500.31 U500.32 U500.33 U500.43 U500.44 U500.45 U700.J1 U700.J9 U700.L1 U700.L9 U700.M7 U701.J1 U701.J9 U701.L1 U701.L9 U701.M7 U800.1 U802.1 U802.6 U803.1 U900.A1 U900.A2 U900.A7 U900.A8 U900.A9 U900.A10 U900.A11 U900.A12 U900.A13 U900.A14 U900.B1 U900.B3 U900.B4 U900.B5 U900.B6 U900.B7 U900.B8 U900.B9 U900.B10 U900.B11 U900.B12 U900.B13 U900.B14 U900.C1 U900.C3 U900.C5 U900.C7 U900.C8 U900.C9 U900.C10 U900.C11 U900.C12 U900.C13 U900.C14 U900.D1 U900.D2 U900.D3 U900.D4 U900.D12 U900.D13 U900.D14 U900.E1 U900.E2 U900.E3 U900.E5 U900.E8 U900.E9 U900.E10 U900.E12 U900.E13 U900.E14 U900.F1 U900.F2 U900.F3 U900.F10 U900.F12 U900.F13 U900.F14 U900.G1 U900.G2 U900.G3 U900.G10 U900.G12 U900.G13 U900.G14 U900.H1 U900.H2 U900.H3 U900.H5 U900.H12 U900.H13 U900.H14 U900.J1 U900.J2 U900.J3 U900.J12 U900.J13 U900.J14 U900.K1 U900.K2 U900.K3 U900.K6 U900.K7 U900.K10 U900.K12 U900.K13 U900.K14 U900.L1 U900.L2 U900.L3 U900.L12 U900.L13 U900.L14 U900.M1 U900.M2 U900.M3 U900.M7 U900.M8 U900.M9 U900.M10 U900.M11 U900.M12 U900.M13 U900.M14 U900.N1 U900.N3 U900.N6 U900.N7 U900.N8 U900.N9 U900.N10 U900.N11 U900.N12 U900.N13 U900.N14 U900.P1 U900.P2 U900.P7 U900.P8 U900.P9 U900.P10 U900.P11 U900.P12 U900.P13 U900.P14 U1000.12 U1000.15 U1000.16 U1000.25 U1200.1 U1200.2 U1200.11 U1200.12 U1200.23 U1200.24 U1200.27 U1200.28 U1301.D1
copper on no net: | length 28.6
  S1 (SIG) w0.05: -4.9,-13.3 2.976,-13.3 2.976,-7.574 -4.9,-7.574 -4.9,-13.3
  S1 (SIG) w0.11: v1(60.288,51.995) 60.688,52.395 ; 62.288,49.135 62.288,49.995

## Polygon pours and split planes (outlines as drawn)
GND on S10 (SIG) "GND_L10_P001" (solid, pour order 1): 61.05,4.8 61.05,5.9 61.4,6.25 68.7,6.25 69.025,5.925 69.025,4.775 68.8,4.55 61.3,4.55
CHASSIS on S1 (SIG) (solid, pour order 25): 0,0.127 0,0 8.75,0 8.75,0.127 114,0.127 114,0 114.13,0 125,0.127 125,101.5 125.25,101.5 125.25,111 125,111 125,111.127 91,111.127 91,109.627 115.987,109.627 115.987,101.5 122,101.5 122,9.5 114,9.5 114,1.877 8.75,1.877 8.75,8.265 1.5,8.265 1.5,100.627 10.75,100.627 10.75,109.627 19,109.627 19,111.127 10.75,111.127 0,111.127 -0.25,111.127 -0.25,0.127
CHASSIS on S1 (SIG) (solid, pour order 17): 40,109.627 72.75,109.627 72.75,111.127 40,111.127
GND on S1 (SIG) "GND_L01_P003" (solid, pour order 3): 75.925,104.712 75.925,106.187 cw(c76.125,106.187) 76.125,106.387 78.95,106.387 cw(c78.95,106.237) 79.1,106.237 79.1,104.662 cw(c78.95,104.662) 78.95,104.512 76.125,104.512 cw(c76.125,104.712)
+VUSB_OTG on S1 (SIG) "+VUSB_OTG_L01_P002" (solid, pour order 2): 80.8,107.476 80.8,106.002 cw(c80.374,106.002) 80.675,105.7 cw(c80.597,105.778) 80.597,105.668 79.331,105.668 ccw(c79.331,105.576) 79.266,105.641 79.225,105.6 79.225,104.406 cw(c78.969,104.406) 79.15,104.225 cw(c79.09,104.285) 79.09,104.2 76.175,104.2 ccw(c76.658,103.717) 75.975,103.717 75.975,101.445 ccw(c76.354,101.61) 76.203,101.225 76.55,101.225 ccw(c76.525,101.406) 76.67,101.295 76.775,101.4 76.775,102.519 cw(c77.031,102.519) 76.85,102.7 cw(c77.272,102.278) 77.273,102.875 80.2,102.875 ccw(c79.355,103.72) 80.55,103.72 80.55,104.579 cw(c80.721,104.579) 80.6,104.7 cw(c80.962,104.338) 80.962,104.85 81.1,104.85 ccw(c80.348,105.602) 81.412,105.602 81.412,107.476 ccw(c81.202,107.476) 81.35,107.625 ccw(c81.29,107.565) 81.29,107.65 80.9,107.65 ccw(c81.024,107.463)
GND on S2 (GND) "GND_L02_P026" (solid, pour order 26): 0.807,111 124.975,111 124.975,0.65 0,0.65 0,105.328

## Other copper
S1 (SIG):
  rectangle net GND: 96.225,11.397 99.267,13.275
  rectangle net +3V3: 61,86.2 63.6,89.85
  rectangle net GND: 80.625,13.35 81.7,15.1
  rectangle net GND: 84.825,16.85 85.95,20.55
  rectangle net GND: 81.175,21.125 82.75,22.975
  rectangle net GND: 85.67,21.25 86.825,22.9
  rectangle net GND: 66.096,96.3 69.275,98.125
  rectangle net GND: 51.45,104.1 53.275,105.2
  rectangle net GND: 51.315,99.275 52.7,100.961
  rectangle net GND: 50.775,96.45 53.075,98.1
  rectangle net GND: 45.65,102.225 47.375,104.4
  rectangle net GND: 42.95,104.008 43.768,105.375
  rectangle net GND: 39.375,103.1 41.125,105.35
  rectangle net GND: 52.241,91.2 54.05,92.884
  rectangle net +5V_UART: 64.359,100.775 65.225,101.692
  text "ddr" at -3.296,-6.946 h1.52
S10 (SIG):
  rectangle net +3V3: 71.625,90.8 73.675,94.975
  rectangle net +3V3: 69.375,92.175 71.875,94.975
  rectangle net +3V3: 71.6,89.9 77.175,92.15
  rectangle net +3V3: 61.325,86.675 68.675,88.85
  rectangle net GND: 73.125,87.197 75.511,89.225
  rectangle net GND: 53.5,102.7 54.75,104.375
  rectangle net GND: 50.317,100.775 51.525,102.334
  rectangle net GND: 42.3,96.475 44.025,97.925
  rectangle net GND: 28,105.675 30.15,106.275
  rectangle net GND: 25.425,105.675 27.575,106.275
  rectangle net GND: 22.95,105.675 25.1,106.275
  rectangle net GND: 20.35,105.675 22.5,106.275
  rectangle net eMMC_VDDI: 73.018,84.05 75.625,86.832
  rectangle net HDR_TCK: 28.035,106.45 30.07,109.45
  rectangle net HDR_TDO: 25.495,106.45 27.53,109.45
  rectangle net HDR_TDI: 22.955,106.45 24.99,109.45
  rectangle net HDR_TMS: 20.415,106.45 22.45,109.45

## Silkscreen, mask and mechanical layers (free items; w line width, h text height)
Top Overlay:
  circle w0.254: c101.475,19.8 r0.506
  circle w0.254: c101.8,15.675 r0.506
  circle w0.254: c108.675,10.375 r0.506
  circle w0.254: c111,10.6 r0.506
  circle w0.254: c114.425,10.5 r0.506
  circle w0.254: c120.5,13.3 r0.506
  circle w0.254: c121.1,17.775 r0.506
  circle w0.254: c115.7,24.694 r0.506
  circle w0.254: c110.35,22.375 r0.506
  circle w0.254: c107.697,24.849 r0.506
  circle w0.2: c37.25,106.65 r0.15
  circle w0.4: c37.993,104.939 r0.2
  circle w0.254: c33.792,105.499 r0.506
  rectangle: 38.425,107.125 38.975,107.7
  region: 37.5,108.4 38,108.9 38.5,108.4
  lines w0.1: 32.576,104.549 34.976,104.549 34.976,106.499 32.576,106.499 32.576,104.549 ; 46,24.675 48.6,24.675 48.6,25.925 46,25.925 46,24.675 ; 72.675,101.95 74.05,101.95 74.05,104.325 72.675,104.325 72.675,101.95
  lines w0.2: 37.25,106.65 37.25,106.325 37.25,106.225 37.973,105.502 38,105.502 38,105.139 ; 37.993,104.939 38,104.939 38,108.4 ; 38,106.045 38.7,106.745 38.7,107.225 ; 101.775,19.575 103.725,17.625 105.975,17.625 ; 102.075,16.15 102.2,16.275 104.725,16.275 106.075,14.925 106.075,14.2 ; 107.675,13.7 107.675,11.6 108.45,10.825 ; 107.675,24.35 107.725,24.3 107.725,19.575 ; 110.425,21.85 111.075,21.2 111.075,19.475 ; 111.025,11.175 111.05,11.2 111.05,13.625 ; 114.082,19.505 114.082,23.082 115.375,24.375 ; 114.7,10.9 115.575,11.775 115.575,13.575 ; 116.425,15.725 118.075,15.725 120.15,13.65 ; 116.45,17.75 117.55,17.75 117.75,17.95 117.75,18.65 117.75,18.85 118.025,19.125 118.375,19.125 118.725,19.125 119,18.85 119,17.95 119.2,17.75 120.55,17.75
  lines w0.3: 19.425,3.3 49.5,3.3 49.5,7.65 19.425,7.65 19.425,3.3
  text "eMMC" at -16.458,110.383 h3.5
  text "eMMC" at -16.192,110.383 h3.5
  text "OTG" at 72.275,108.176 h3
  text "USB" at 52.225,107.725 h3
  text "UART" at 52.525,105.851 h3
  text "LED" at 71.125,103.525 h1
  text "JTAG" at 32.825,102.676 h3
  text "BOOT MODES" at 24.05,94.563 h1.5
  text "ETHERNET" at 94,93.6 h4 r90
  text "0" at 25.604,78.089 h2
  text "1" at 28.298,78.078 h2
  text "2" at 30.679,78.081 h2
  text "eMMC" at 67.142,76.908 h3.5
  text "QSPI" at 44.95,75.342 h2
  text "RST" at 37.628,74.982 h2
  text "DDR3L" at 30.115,70.379 h3.5
  text "ZYNQ" at 62.082,66.653 h3.5
  text "DDR3L" at 30.115,54.929 h3.5
  text "MIPI CSI-2" at 27.025,29.51 h4
  text "DONE" at 45.3,26.268 h2
  text "UK" at 106.25,13.988 h10
  text "PRG" at 36.848,13.44 h2
  text "HDMI" at 69.2,10.975 h4
  text "ZHSD BOARD" at 20,3.953 h6
Top Solder:
  rectangle: 114.5,0 125.25,9.75
  rectangle: 92.413,108.25 115.75,111
  rectangle: 115.75,101.5 125.25,111
  rectangle: 9.25,109.5 19.5,111
  rectangle: 0,100.5 9.5,111
  rectangle: 75.25,0 115.5,2
  region: 123.25,50 123.25,8.5 125.25,8.5 125.25,50
  region: 123.25,101.75 123.25,66.226 125.25,66.226 125.25,101.75
  region: 79.75,111.25 44.226,111.25 44.226,109.25 79.75,109.25
  region: 2,62.5 2,100.75 0,100.75 0,62.5
  region: 2,8.5 2,44.024 0,44.024 0,8.5
  rectangle: 9.5,0 45.024,2

## Text inside footprints (layer, text, board x,y; h text height)
SW900: Top Overlay "ON" at 21.468,89.054 h1